# Altium PCB KUOZHAN.PCBDOC (part 20 of 21)
Units mm, origin at the board's own origin, x right, y up, seen from the top; angles counter-clockwise.
Board outline 165.51 x 116.38 mm, 2 copper layers (Top Layer, Bottom Layer); 171 components, 245 nets, 894 pads, 298 vias.
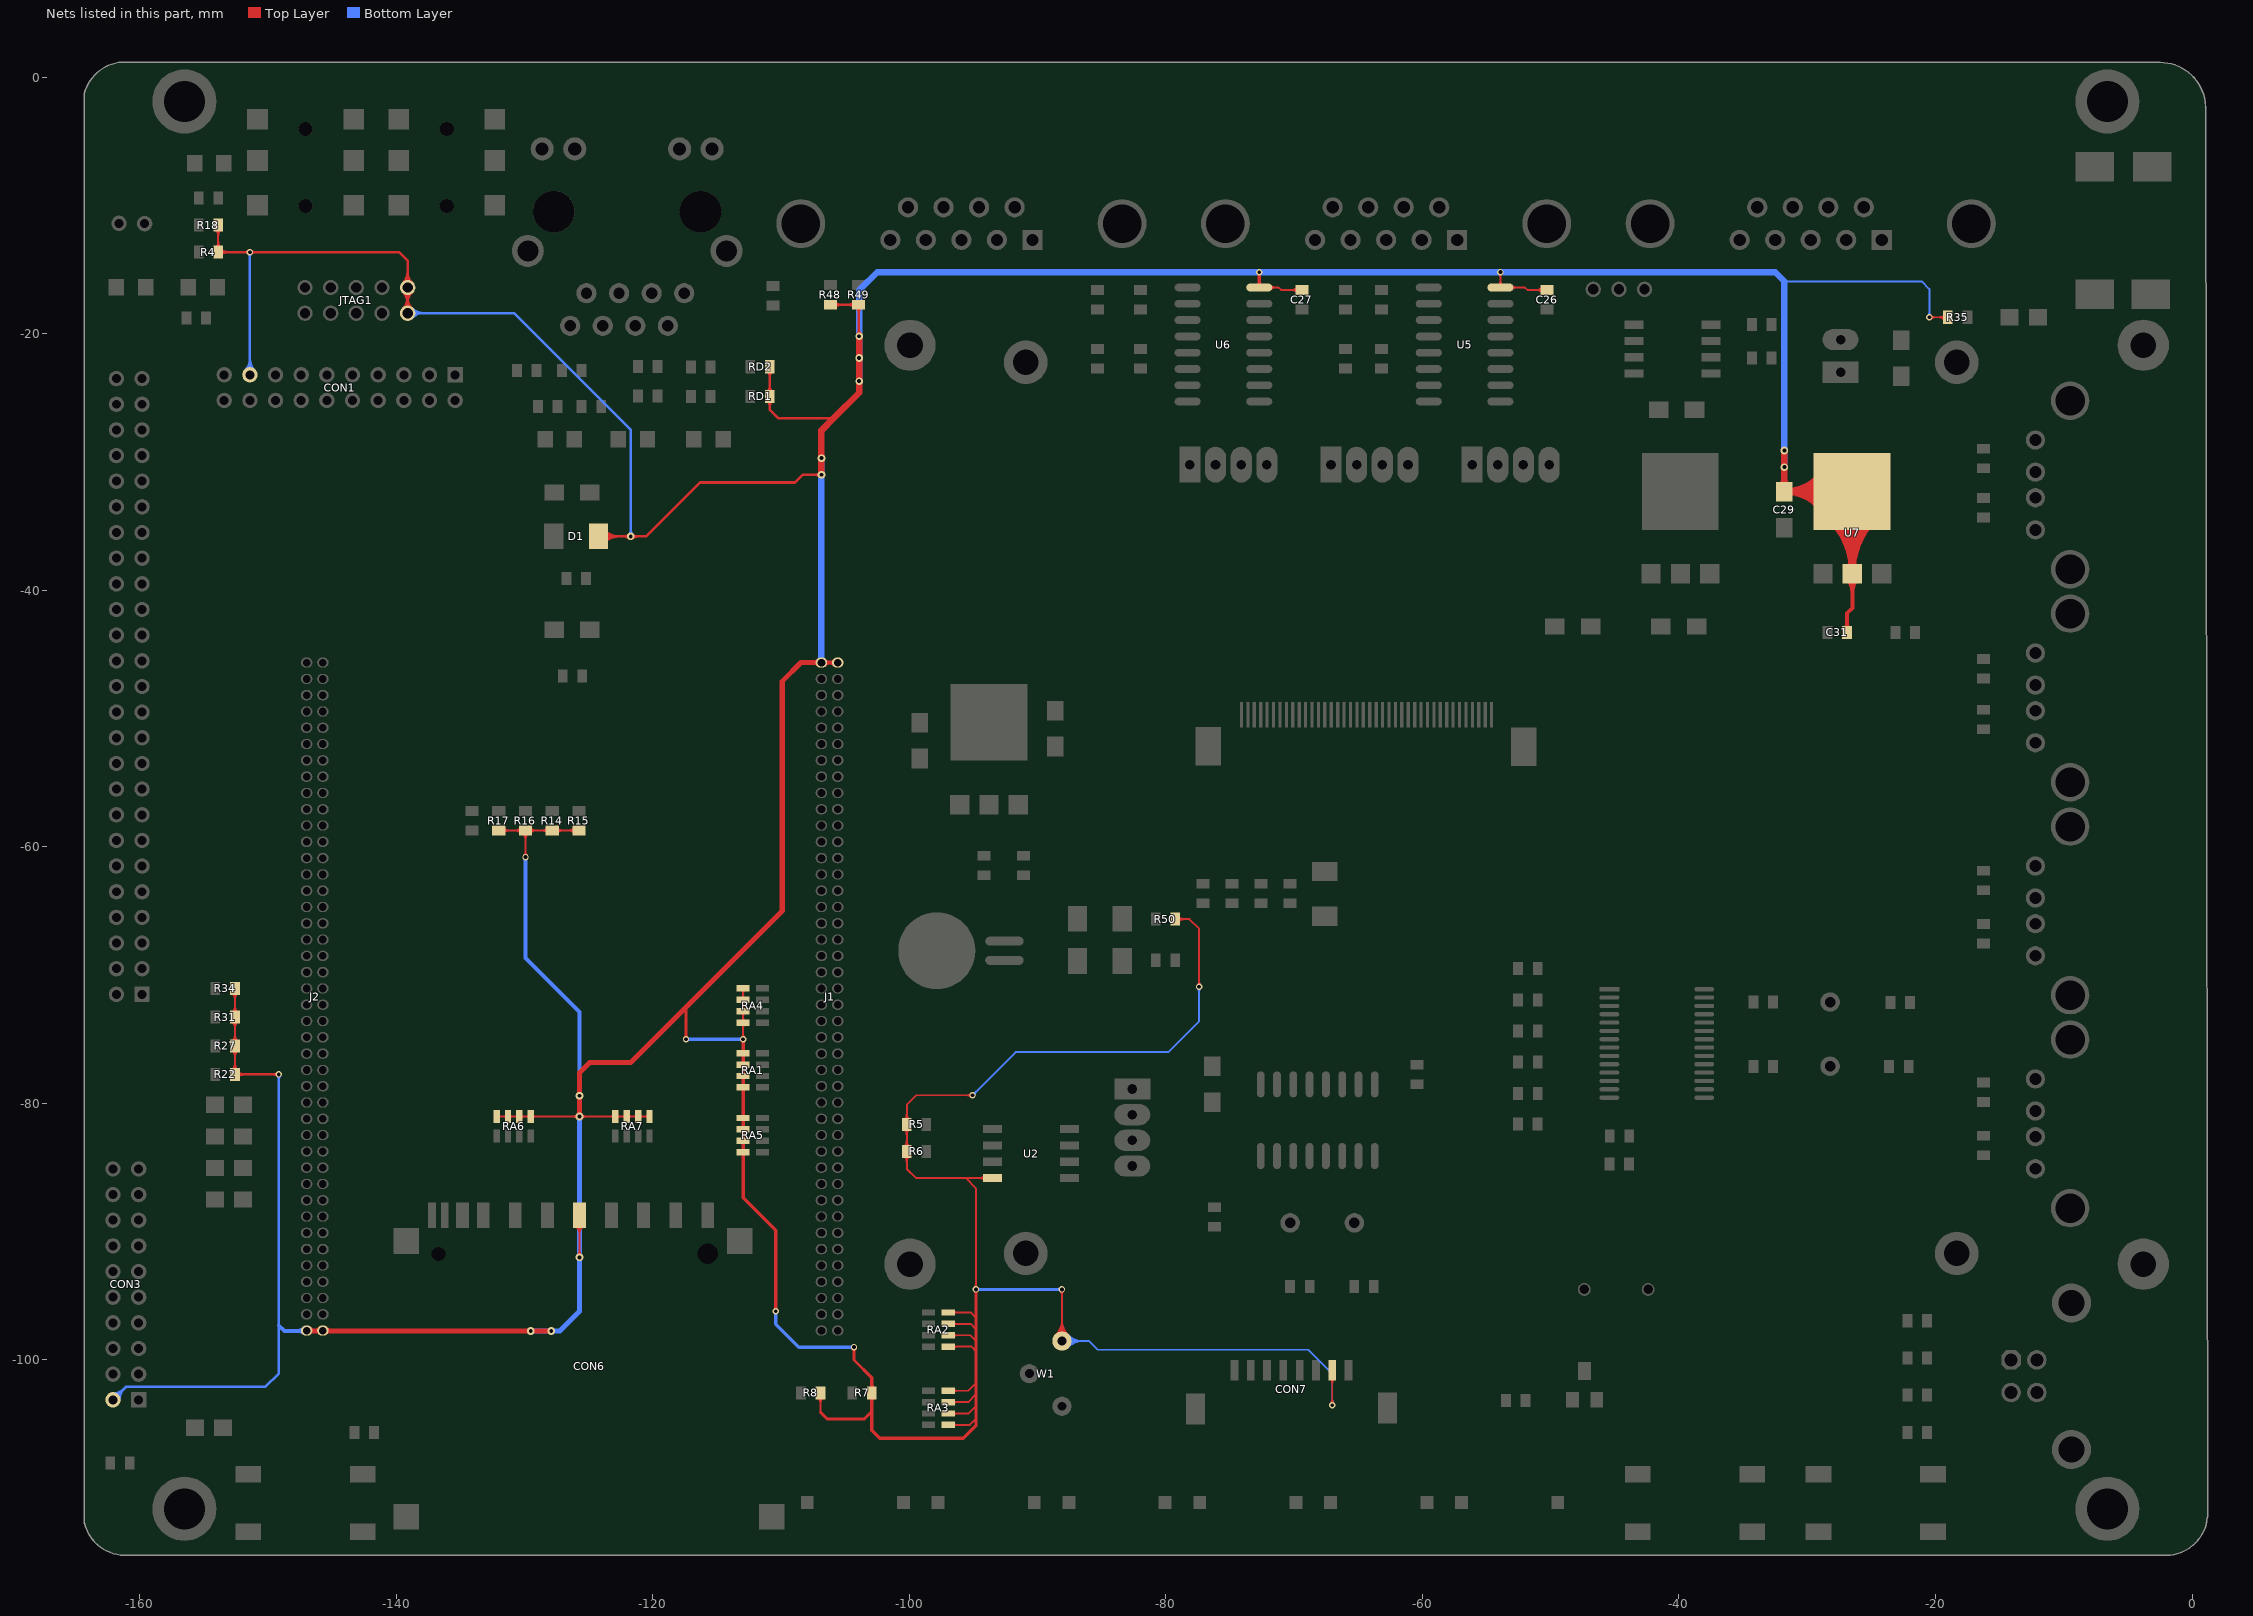
[diagram p20: the nets of this part, all layers, seen from the top]

## Via types
v1: diameter 0.5, hole 0.3, Top Layer to Bottom Layer, 272 vias
v2: diameter 0.6, hole 0.3, Top Layer to Bottom Layer, 24 vias
v3: diameter 0.9, hole 0.9, Top Layer to Bottom Layer, 2 vias

## Nets (pads, with @x,y where several pads share a name; then routed paths per layer and width w, separated by ;. In a path a pad name is that pad's centre, name@x,y a point inside that pad or via, vN(x,y) a via of type N, cw(c..) or ccw(c..) an arc to the next point about the centre after c; other vN are vias at no path point) (continued)
VDD33V: (continued)
  Top Layer w0.2: R4.2@-153.863,-13.64 -152.06,-13.64 -139.76,-13.64 -139.099,-14.301 JTAG1.1@-139.099,-16.403 JTAG1.2@-139.099,-18.403 ; R22.2@-152.563,-77.74 v1(-149.14,-77.74) ; -151.65,-13.64 cw(c-151.65,-13.904) v1@-151.464,-13.718 ; v1@-151.62,-13.64 ccw(c-151.62,-13.421) v1@-151.464,-13.576 ; v1@-151.323,-13.718 cw(c-151.137,-13.904) -151.137,-13.64 ; v1@-151.323,-13.576 ccw(c-151.168,-13.421) v1@-151.168,-13.64 ; v1@-149.211,-77.811 ccw(c-149.382,-77.982) -149.382,-77.74 ccw(c-149.382,-77.499) v1@-149.211,-77.67 ; D1.1@-124.215,-35.801 -120.501,-35.801 -116.3,-31.6 -108.9,-31.6 -108.3,-31 v2(-106.841,-31) ; RD2.2@-110.863,-22.576 RD1.2@-110.863,-24.89 -110.863,-25.937 -110.2,-26.6 -105.9,-26.6 ; R48.2@-106.14,-17.737 R49.2@-103.94,-17.737 v2@-103.94,-20.16 ; R4.2@-153.665,-13.839 cw(c-153.185,-14.319) -153.185,-13.64 ; R4.2@-153.665,-13.839 cw(c-153.185,-14.319) -153.185,-13.64 ; R4.2@-153.665,-13.839 cw(c-153.185,-14.319) -153.185,-13.64 ; R4.2@-153.665,-13.839 cw(c-153.185,-14.319) -153.185,-13.64 ; R4.2@-153.665,-13.839 cw(c-153.185,-14.319) -153.185,-13.64 ; R4.2@-153.665,-13.442 ccw(c-153.185,-12.962) -153.185,-13.64 ; R4.2@-153.665,-13.442 ccw(c-153.185,-12.962) -153.185,-13.64 ; R4.2@-153.665,-13.442 ccw(c-153.185,-12.962) -153.185,-13.64 ; R4.2@-153.665,-13.442 ccw(c-153.185,-12.962) -153.185,-13.64 ; R4.2@-153.665,-13.442 ccw(c-153.185,-12.962) -153.185,-13.64 ; R22.2@-152.365,-77.939 cw(c-151.885,-78.419) -151.885,-77.74 ; R22.2@-152.365,-77.939 cw(c-151.885,-78.419) -151.885,-77.74 ; R22.2@-152.365,-77.939 cw(c-151.885,-78.419) -151.885,-77.74 ; R22.2@-152.365,-77.939 cw(c-151.885,-78.419) -151.885,-77.74 ; R22.2@-152.365,-77.939 cw(c-151.885,-78.419) -151.885,-77.74 ; R22.2@-152.365,-77.542 ccw(c-151.885,-77.062) -151.885,-77.74 ; R22.2@-152.365,-77.542 ccw(c-151.885,-77.062) -151.885,-77.74 ; R22.2@-152.365,-77.542 ccw(c-151.885,-77.062) -151.885,-77.74 ; R22.2@-152.365,-77.542 ccw(c-151.885,-77.062) -151.885,-77.74 ; R22.2@-152.365,-77.542 ccw(c-151.885,-77.062) -151.885,-77.74 ; -151.771,-13.64 cw(c-151.771,-14.024) v1@-151.5,-13.753 ; -151.771,-13.64 cw(c-151.771,-14.024) v1@-151.5,-13.753 ; -151.771,-13.64 cw(c-151.771,-14.024) v1@-151.5,-13.753 ; -151.771,-13.64 cw(c-151.771,-14.024) v1@-151.5,-13.753 ; -151.74,-13.64 ccw(c-151.74,-13.3) v1@-151.5,-13.541 ; -151.74,-13.64 ccw(c-151.74,-13.3) v1@-151.5,-13.541 ; -151.74,-13.64 ccw(c-151.74,-13.3) v1@-151.5,-13.541 ; -151.74,-13.64 ccw(c-151.74,-13.3) v1@-151.5,-13.541 ; v1@-151.288,-13.753 cw(c-151.016,-14.024) -151.016,-13.64 ; v1@-151.288,-13.753 cw(c-151.016,-14.024) -151.016,-13.64 ; v1@-151.288,-13.753 cw(c-151.016,-14.024) -151.016,-13.64 ; v1@-151.288,-13.753 cw(c-151.016,-14.024) -151.016,-13.64 ; v1@-151.288,-13.541 ccw(c-151.047,-13.3) -151.047,-13.64 ; v1@-151.288,-13.541 ccw(c-151.047,-13.3) -151.047,-13.64 ; v1@-151.288,-13.541 ccw(c-151.047,-13.3) -151.047,-13.64 ; v1@-151.288,-13.541 ccw(c-151.047,-13.3) -151.047,-13.64 ; -149.503,-77.74 cw(c-149.503,-78.103) v1@-149.246,-77.846 ; -149.503,-77.74 ccw(c-149.503,-77.378) v1@-149.246,-77.634 ; -149.503,-77.74 cw(c-149.503,-78.103) v1@-149.246,-77.846 ; -149.503,-77.74 ccw(c-149.503,-77.378) v1@-149.246,-77.634 ; -149.503,-77.74 cw(c-149.503,-78.103) v1@-149.246,-77.846 ; -149.503,-77.74 ccw(c-149.503,-77.378) v1@-149.246,-77.634 ; -149.503,-77.74 ccw(c-149.503,-77.378) v1@-149.246,-77.634 ; -149.503,-77.74 cw(c-149.503,-78.103) v1@-149.246,-77.846 ; JTAG1.2@-139.452,-18.049 ccw(c-140.306,-17.195) -139.099,-17.195 ; JTAG1.2@-139.452,-18.049 ccw(c-140.306,-17.195) -139.099,-17.195 ; JTAG1.2@-139.452,-18.049 ccw(c-140.306,-17.195) -139.099,-17.195 ; JTAG1.2@-139.452,-18.049 ccw(c-140.306,-17.195) -139.099,-17.195 ; JTAG1.2@-139.452,-18.049 ccw(c-140.306,-17.195) -139.099,-17.195 ; JTAG1.1@-139.452,-16.756 cw(c-140.306,-17.61) -139.099,-17.61 ; JTAG1.1@-139.452,-16.756 cw(c-140.306,-17.61) -139.099,-17.61 ; JTAG1.1@-139.452,-16.756 cw(c-140.306,-17.61) -139.099,-17.61 ; JTAG1.1@-139.452,-16.756 cw(c-140.306,-17.61) -139.099,-17.61 ; JTAG1.1@-139.452,-16.756 cw(c-140.306,-17.61) -139.099,-17.61 ; JTAG1.1@-139.452,-16.049 ccw(c-140.306,-15.195) -139.099,-15.195 ; JTAG1.1@-139.452,-16.049 ccw(c-140.306,-15.195) -139.099,-15.195 ; JTAG1.1@-139.452,-16.049 ccw(c-140.306,-15.195) -139.099,-15.195 ; JTAG1.1@-139.452,-16.049 ccw(c-140.306,-15.195) -139.099,-15.195 ; JTAG1.1@-139.452,-16.049 ccw(c-140.306,-15.195) -139.099,-15.195 ; JTAG1.2@-139.311,-18.19 ccw(c-139.823,-17.678) -139.099,-17.678 ; JTAG1.2@-139.311,-18.19 ccw(c-139.823,-17.678) -139.099,-17.678 ; JTAG1.2@-139.311,-18.19 ccw(c-139.823,-17.678) -139.099,-17.678 ; JTAG1.2@-139.311,-18.19 ccw(c-139.823,-17.678) -139.099,-17.678 ; JTAG1.2@-139.311,-18.19 ccw(c-139.823,-17.678) -139.099,-17.678 ; JTAG1.1@-139.311,-16.615 cw(c-139.823,-17.127) -139.099,-17.127 ; JTAG1.1@-139.311,-16.615 cw(c-139.823,-17.127) -139.099,-17.127 ; JTAG1.1@-139.311,-16.615 cw(c-139.823,-17.127) -139.099,-17.127 ; JTAG1.1@-139.311,-16.615 cw(c-139.823,-17.127) -139.099,-17.127 ; JTAG1.1@-139.311,-16.615 cw(c-139.823,-17.127) -139.099,-17.127 ; JTAG1.1@-139.311,-16.19 ccw(c-139.823,-15.678) -139.099,-15.678 ; JTAG1.1@-139.311,-16.19 ccw(c-139.823,-15.678) -139.099,-15.678 ; JTAG1.1@-139.311,-16.19 ccw(c-139.823,-15.678) -139.099,-15.678 ; JTAG1.1@-139.311,-16.19 ccw(c-139.823,-15.678) -139.099,-15.678 ; JTAG1.1@-139.311,-16.19 ccw(c-139.823,-15.678) -139.099,-15.678 ; -139.099,-17.678 ccw(c-138.375,-17.678) JTAG1.2@-138.887,-18.19 ; -139.099,-17.678 ccw(c-138.375,-17.678) JTAG1.2@-138.887,-18.19 ; -139.099,-17.678 ccw(c-138.375,-17.678) JTAG1.2@-138.887,-18.19 ; -139.099,-17.678 ccw(c-138.375,-17.678) JTAG1.2@-138.887,-18.19 ; -139.099,-17.678 ccw(c-138.375,-17.678) JTAG1.2@-138.887,-18.19 ; -139.099,-17.61 cw(c-137.892,-17.61) JTAG1.1@-138.745,-16.756 ; -139.099,-17.61 cw(c-137.892,-17.61) JTAG1.1@-138.745,-16.756 ; -139.099,-17.61 cw(c-137.892,-17.61) JTAG1.1@-138.745,-16.756 ; -139.099,-17.61 cw(c-137.892,-17.61) JTAG1.1@-138.745,-16.756 ; -139.099,-17.61 cw(c-137.892,-17.61) JTAG1.1@-138.745,-16.756 ; -139.099,-17.195 ccw(c-137.892,-17.195) JTAG1.2@-138.745,-18.049 ; -139.099,-17.195 ccw(c-137.892,-17.195) JTAG1.2@-138.745,-18.049 ; -139.099,-17.195 ccw(c-137.892,-17.195) JTAG1.2@-138.745,-18.049 ; -139.099,-17.195 ccw(c-137.892,-17.195) JTAG1.2@-138.745,-18.049 ; -139.099,-17.195 ccw(c-137.892,-17.195) JTAG1.2@-138.745,-18.049 ; -139.099,-17.127 cw(c-138.375,-17.127) JTAG1.1@-138.887,-16.615 ; -139.099,-17.127 cw(c-138.375,-17.127) JTAG1.1@-138.887,-16.615 ; -139.099,-17.127 cw(c-138.375,-17.127) JTAG1.1@-138.887,-16.615 ; -139.099,-17.127 cw(c-138.375,-17.127) JTAG1.1@-138.887,-16.615 ; -139.099,-17.127 cw(c-138.375,-17.127) JTAG1.1@-138.887,-16.615 ; -139.099,-15.678 ccw(c-138.375,-15.678) JTAG1.1@-138.887,-16.19 ; -139.099,-15.678 ccw(c-138.375,-15.678) JTAG1.1@-138.887,-16.19 ; -139.099,-15.678 ccw(c-138.375,-15.678) JTAG1.1@-138.887,-16.19 ; -139.099,-15.678 ccw(c-138.375,-15.678) JTAG1.1@-138.887,-16.19 ; -139.099,-15.678 ccw(c-138.375,-15.678) JTAG1.1@-138.887,-16.19 ; -139.099,-15.195 ccw(c-137.892,-15.195) JTAG1.1@-138.745,-16.049 ; -139.099,-15.195 ccw(c-137.892,-15.195) JTAG1.1@-138.745,-16.049 ; -139.099,-15.195 ccw(c-137.892,-15.195) JTAG1.1@-138.745,-16.049 ; -139.099,-15.195 ccw(c-137.892,-15.195) JTAG1.1@-138.745,-16.049 ; -139.099,-15.195 ccw(c-137.892,-15.195) JTAG1.1@-138.745,-16.049 ; D1.1@-123.896,-36.119 cw(c-123.128,-36.887) -123.128,-35.801 ; D1.1@-123.896,-36.119 cw(c-123.128,-36.887) -123.128,-35.801 ; D1.1@-123.896,-36.119 cw(c-123.128,-36.887) -123.128,-35.801 ; D1.1@-123.896,-36.119 cw(c-123.128,-36.887) -123.128,-35.801 ; D1.1@-123.896,-36.119 cw(c-123.128,-36.887) -123.128,-35.801 ; D1.1@-123.896,-35.482 ccw(c-123.128,-34.714) -123.128,-35.801 ; D1.1@-123.896,-35.482 ccw(c-123.128,-34.714) -123.128,-35.801 ; D1.1@-123.896,-35.482 ccw(c-123.128,-34.714) -123.128,-35.801 ; D1.1@-123.896,-35.482 ccw(c-123.128,-34.714) -123.128,-35.801 ; D1.1@-123.896,-35.482 ccw(c-123.128,-34.714) -123.128,-35.801 ; D1.1@-123.755,-36.26 cw(c-122.645,-37.37) -122.645,-35.801 ; D1.1@-123.755,-36.26 cw(c-122.645,-37.37) -122.645,-35.801 ; D1.1@-123.755,-36.26 cw(c-122.645,-37.37) -122.645,-35.801 ; D1.1@-123.755,-36.26 cw(c-122.645,-37.37) -122.645,-35.801 ; D1.1@-123.755,-36.26 cw(c-122.645,-37.37) -122.645,-35.801 ; D1.1@-123.755,-35.341 ccw(c-122.645,-34.231) -122.645,-35.801 ; D1.1@-123.755,-35.341 ccw(c-122.645,-34.231) -122.645,-35.801 ; D1.1@-123.755,-35.341 ccw(c-122.645,-34.231) -122.645,-35.801 ; D1.1@-123.755,-35.341 ccw(c-122.645,-34.231) -122.645,-35.801 ; D1.1@-123.755,-35.341 ccw(c-122.645,-34.231) -122.645,-35.801 ; -122.183,-35.801 cw(c-122.183,-36.283) v2@-121.841,-35.942 ; -122.183,-35.801 ccw(c-122.183,-35.318) v2@-121.841,-35.659 ; -122.183,-35.801 cw(c-122.183,-36.283) v2@-121.841,-35.942 ; -122.183,-35.801 ccw(c-122.183,-35.318) v2@-121.841,-35.659 ; -122.183,-35.801 cw(c-122.183,-36.283) v2@-121.841,-35.942 ; -122.183,-35.801 ccw(c-122.183,-35.318) v2@-121.841,-35.659 ; -122.183,-35.801 cw(c-122.183,-36.283) v2@-121.841,-35.942 ; -122.183,-35.801 ccw(c-122.183,-35.318) v2@-121.841,-35.659 ; -122.183,-35.801 ccw(c-122.183,-35.318) v2@-121.841,-35.659 ; -122.183,-35.801 cw(c-122.183,-36.283) v2@-121.841,-35.942 ; v2@-121.559,-35.942 cw(c-121.217,-36.283) -121.217,-35.801 ; v2@-121.559,-35.942 cw(c-121.217,-36.283) -121.217,-35.801 ; v2@-121.559,-35.942 cw(c-121.217,-36.283) -121.217,-35.801 ; v2@-121.559,-35.942 cw(c-121.217,-36.283) -121.217,-35.801 ; v2@-121.559,-35.942 cw(c-121.217,-36.283) -121.217,-35.801 ; v2@-121.559,-35.659 ccw(c-121.217,-35.318) -121.217,-35.801 ; v2@-121.559,-35.659 ccw(c-121.217,-35.318) -121.217,-35.801 ; v2@-121.559,-35.659 ccw(c-121.217,-35.318) -121.217,-35.801 ; v2@-121.559,-35.659 ccw(c-121.217,-35.318) -121.217,-35.801 ; v2@-121.559,-35.659 ccw(c-121.217,-35.318) -121.217,-35.801 ; RD1.2@-111.062,-25.215 cw(c-111.542,-25.695) -110.863,-25.695 ; RD1.2@-111.062,-25.215 cw(c-111.542,-25.695) -110.863,-25.695 ; RD1.2@-111.062,-25.215 cw(c-111.542,-25.695) -110.863,-25.695 ; RD1.2@-111.062,-25.215 cw(c-111.542,-25.695) -110.863,-25.695 ; RD1.2@-111.062,-25.215 cw(c-111.542,-25.695) -110.863,-25.695 ; RD1.2@-111.062,-24.564 ccw(c-111.542,-24.084) -110.863,-24.084 ; RD1.2@-111.062,-24.564 ccw(c-111.542,-24.084) -110.863,-24.084 ; RD1.2@-111.062,-24.564 ccw(c-111.542,-24.084) -110.863,-24.084 ; RD1.2@-111.062,-24.564 ccw(c-111.542,-24.084) -110.863,-24.084 ; RD1.2@-111.062,-24.564 ccw(c-111.542,-24.084) -110.863,-24.084 ; RD2.2@-111.062,-22.902 cw(c-111.542,-23.382) -110.863,-23.382 ; RD2.2@-111.062,-22.902 cw(c-111.542,-23.382) -110.863,-23.382 ; RD2.2@-111.062,-22.902 cw(c-111.542,-23.382) -110.863,-23.382 ; RD2.2@-111.062,-22.902 cw(c-111.542,-23.382) -110.863,-23.382 ; RD2.2@-111.062,-22.902 cw(c-111.542,-23.382) -110.863,-23.382 ; -110.863,-25.695 cw(c-110.185,-25.695) RD1.2@-110.665,-25.215 ; -110.863,-25.695 cw(c-110.185,-25.695) RD1.2@-110.665,-25.215 ; -110.863,-25.695 cw(c-110.185,-25.695) RD1.2@-110.665,-25.215 ; -110.863,-25.695 cw(c-110.185,-25.695) RD1.2@-110.665,-25.215 ; -110.863,-25.695 cw(c-110.185,-25.695) RD1.2@-110.665,-25.215 ; -110.863,-24.084 ccw(c-110.185,-24.084) RD1.2@-110.665,-24.564 ; -110.863,-24.084 ccw(c-110.185,-24.084) RD1.2@-110.665,-24.564 ; -110.863,-24.084 ccw(c-110.185,-24.084) RD1.2@-110.665,-24.564 ; -110.863,-24.084 ccw(c-110.185,-24.084) RD1.2@-110.665,-24.564 ; -110.863,-24.084 ccw(c-110.185,-24.084) RD1.2@-110.665,-24.564 ; -110.863,-23.382 cw(c-110.185,-23.382) RD2.2@-110.665,-22.902 ; -110.863,-23.382 cw(c-110.185,-23.382) RD2.2@-110.665,-22.902 ; -110.863,-23.382 cw(c-110.185,-23.382) RD2.2@-110.665,-22.902 ; -110.863,-23.382 cw(c-110.185,-23.382) RD2.2@-110.665,-22.902 ; -110.863,-23.382 cw(c-110.185,-23.382) RD2.2@-110.665,-22.902 ; -107.324,-31 cw(c-107.324,-31.483) v2@-106.982,-31.141 ; -107.324,-31 ccw(c-107.324,-30.517) v2@-106.982,-30.859 ; -107.324,-31 cw(c-107.324,-31.483) v2@-106.982,-31.141 ; -107.324,-31 ccw(c-107.324,-30.517) v2@-106.982,-30.859 ; -107.324,-31 cw(c-107.324,-31.483) v2@-106.982,-31.141 ; -107.324,-31 ccw(c-107.324,-30.517) v2@-106.982,-30.859 ; -107.324,-31 cw(c-107.324,-31.483) v2@-106.982,-31.141 ; -107.324,-31 ccw(c-107.324,-30.517) v2@-106.982,-30.859 ; -107.324,-31 ccw(c-107.324,-30.517) v2@-106.982,-30.859 ; -107.324,-31 cw(c-107.324,-31.483) v2@-106.982,-31.141 ; R48.2@-105.815,-17.935 cw(c-105.335,-18.415) -105.335,-17.737 ; R48.2@-105.815,-17.935 cw(c-105.335,-18.415) -105.335,-17.737 ; R48.2@-105.815,-17.935 cw(c-105.335,-18.415) -105.335,-17.737 ; R48.2@-105.815,-17.935 cw(c-105.335,-18.415) -105.335,-17.737 ; R48.2@-105.815,-17.935 cw(c-105.335,-18.415) -105.335,-17.737 ; R48.2@-105.815,-17.538 ccw(c-105.335,-17.058) -105.335,-17.737 ; R48.2@-105.815,-17.538 ccw(c-105.335,-17.058) -105.335,-17.737 ; R48.2@-105.815,-17.538 ccw(c-105.335,-17.058) -105.335,-17.737 ; R48.2@-105.815,-17.538 ccw(c-105.335,-17.058) -105.335,-17.737 ; R48.2@-105.815,-17.538 ccw(c-105.335,-17.058) -105.335,-17.737 ; -104.746,-17.737 cw(c-104.746,-18.415) R49.2@-104.266,-17.935 ; -104.746,-17.737 ccw(c-104.746,-17.058) R49.2@-104.266,-17.538 ; -104.746,-17.737 cw(c-104.746,-18.415) R49.2@-104.266,-17.935 ; -104.746,-17.737 ccw(c-104.746,-17.058) R49.2@-104.266,-17.538 ; -104.746,-17.737 cw(c-104.746,-18.415) R49.2@-104.266,-17.935 ; -104.746,-17.737 ccw(c-104.746,-17.058) R49.2@-104.266,-17.538 ; -104.746,-17.737 cw(c-104.746,-18.415) R49.2@-104.266,-17.935 ; -104.746,-17.737 ccw(c-104.746,-17.058) R49.2@-104.266,-17.538 ; -104.746,-17.737 ccw(c-104.746,-17.058) R49.2@-104.266,-17.538 ; -104.746,-17.737 cw(c-104.746,-18.415) R49.2@-104.266,-17.935 ; R49.2@-104.139,-17.935 cw(c-104.619,-18.415) -103.94,-18.415 ; R49.2@-104.139,-17.935 cw(c-104.619,-18.415) -103.94,-18.415 ; R49.2@-104.139,-17.935 cw(c-104.619,-18.415) -103.94,-18.415 ; R49.2@-104.139,-17.935 cw(c-104.619,-18.415) -103.94,-18.415 ; R49.2@-104.139,-17.935 cw(c-104.619,-18.415) -103.94,-18.415 ; v2@-104.041,-20.059 ccw(c-104.285,-19.815) -103.94,-19.815 ; v2@-104.041,-20.059 ccw(c-104.285,-19.815) -103.94,-19.815 ; v2@-104.041,-20.059 ccw(c-104.285,-19.815) -103.94,-19.815 ; v2@-104.041,-20.059 ccw(c-104.285,-19.815) -103.94,-19.815 ; v2@-104.041,-20.059 ccw(c-104.285,-19.815) -103.94,-19.815 ; -103.94,-19.62 ccw(c-103.32,-19.62) v2@-103.759,-20.059 ; -103.94,-19.62 ccw(c-103.32,-19.62) v2@-103.759,-20.059 ; -103.94,-19.62 ccw(c-103.32,-19.62) v2@-103.759,-20.059 ; -103.94,-19.62 ccw(c-103.32,-19.62) v2@-103.759,-20.059 ; -103.94,-19.62 ccw(c-103.32,-19.62) v2@-103.759,-20.059 ; -103.94,-18.415 cw(c-103.262,-18.415) R49.2@-103.742,-17.935 ; -103.94,-18.415 cw(c-103.262,-18.415) R49.2@-103.742,-17.935 ; -103.94,-18.415 cw(c-103.262,-18.415) R49.2@-103.742,-17.935 ; -103.94,-18.415 cw(c-103.262,-18.415) R49.2@-103.742,-17.935 ; -103.94,-18.415 cw(c-103.262,-18.415) R49.2@-103.742,-17.935
  Top Layer w0.25: v1(-117.4,-75) -117.4,-72.5 ; v1(-112.944,-75) RA1.5@-112.944,-76.087 RA1.6@-112.944,-76.976 RA1.7@-112.944,-77.865 RA1.8@-112.944,-78.754 RA5.5@-112.944,-81.137 RA5.6@-112.944,-82.026 RA5.7@-112.944,-82.915 RA5.8@-112.944,-83.804 -112.944,-87.356 -110.4,-89.9 v1(-110.4,-96.2) ; -106.913,-104.087 -106.4,-104.6 -103.5,-104.6 -102.913,-104.013 ; v1(-104.3,-99) -104.3,-100 -102.913,-101.387 R7.1@-102.913,-102.56 -102.913,-104.013 ; -94.8,-104.8 -94.8,-102.685 -94.8,-101.8 -94.8,-99.3 -94.8,-98.5 -94.8,-97.6 -94.8,-96.7 v1(-94.8,-94.5) ; -94.8,-104.6 -94.8,-105.125 -95.775,-106.1 -102.3,-106.1 -102.913,-105.487 -102.913,-104.013 ; v1@-117.488,-74.912 ccw(c-117.702,-74.698) -117.4,-74.698 ; v1@-117.488,-74.912 ccw(c-117.702,-74.698) -117.4,-74.698 ; v1@-117.488,-74.912 ccw(c-117.702,-74.698) -117.4,-74.698 ; -117.4,-74.698 ccw(c-117.098,-74.698) v1@-117.312,-74.912 ; -117.4,-74.698 ccw(c-117.098,-74.698) v1@-117.312,-74.912 ; -117.4,-74.698 ccw(c-117.098,-74.698) v1@-117.312,-74.912 ; RA5.8@-113.032,-83.892 cw(c-113.245,-84.106) -112.944,-84.106 ; RA5.8@-113.032,-83.892 cw(c-113.245,-84.106) -112.944,-84.106 ; RA5.8@-113.032,-83.892 cw(c-113.245,-84.106) -112.944,-84.106 ; RA5.8@-113.032,-83.716 ccw(c-113.245,-83.502) -112.944,-83.502 ; RA5.8@-113.032,-83.716 ccw(c-113.245,-83.502) -112.944,-83.502 ; RA5.8@-113.032,-83.716 ccw(c-113.245,-83.502) -112.944,-83.502 ; RA5.7@-113.032,-83.003 cw(c-113.245,-83.217) -112.944,-83.217 ; RA5.7@-113.032,-83.003 cw(c-113.245,-83.217) -112.944,-83.217 ; RA5.7@-113.032,-83.003 cw(c-113.245,-83.217) -112.944,-83.217 ; RA5.7@-113.032,-82.827 ccw(c-113.245,-82.613) -112.944,-82.613 ; RA5.7@-113.032,-82.827 ccw(c-113.245,-82.613) -112.944,-82.613 ; RA5.7@-113.032,-82.827 ccw(c-113.245,-82.613) -112.944,-82.613 ; RA5.6@-113.032,-82.114 cw(c-113.245,-82.328) -112.944,-82.328 ; RA5.6@-113.032,-82.114 cw(c-113.245,-82.328) -112.944,-82.328 ; RA5.6@-113.032,-82.114 cw(c-113.245,-82.328) -112.944,-82.328 ; RA5.6@-113.032,-81.938 ccw(c-113.245,-81.724) -112.944,-81.724 ; RA5.6@-113.032,-81.938 ccw(c-113.245,-81.724) -112.944,-81.724 ; RA5.6@-113.032,-81.938 ccw(c-113.245,-81.724) -112.944,-81.724 ; RA5.5@-113.032,-81.225 cw(c-113.245,-81.439) -112.944,-81.439 ; RA5.5@-113.032,-81.225 cw(c-113.245,-81.439) -112.944,-81.439 ; RA5.5@-113.032,-81.225 cw(c-113.245,-81.439) -112.944,-81.439 ; RA5.5@-113.032,-81.049 ccw(c-113.245,-80.835) -112.944,-80.835 ; RA5.5@-113.032,-81.049 ccw(c-113.245,-80.835) -112.944,-80.835 ; RA5.5@-113.032,-81.049 ccw(c-113.245,-80.835) -112.944,-80.835 ; RA1.8@-113.032,-78.842 cw(c-113.245,-79.056) -112.944,-79.056 ; RA1.8@-113.032,-78.842 cw(c-113.245,-79.056) -112.944,-79.056 ; RA1.8@-113.032,-78.842 cw(c-113.245,-79.056) -112.944,-79.056 ; RA1.8@-113.032,-78.666 ccw(c-113.245,-78.452) -112.944,-78.452 ; RA1.8@-113.032,-78.666 ccw(c-113.245,-78.452) -112.944,-78.452 ; RA1.8@-113.032,-78.666 ccw(c-113.245,-78.452) -112.944,-78.452 ; RA1.7@-113.032,-77.953 cw(c-113.245,-78.167) -112.944,-78.167 ; RA1.7@-113.032,-77.953 cw(c-113.245,-78.167) -112.944,-78.167 ; RA1.7@-113.032,-77.953 cw(c-113.245,-78.167) -112.944,-78.167 ; RA1.7@-113.032,-77.777 ccw(c-113.245,-77.563) -112.944,-77.563 ; RA1.7@-113.032,-77.777 ccw(c-113.245,-77.563) -112.944,-77.563 ; RA1.7@-113.032,-77.777 ccw(c-113.245,-77.563) -112.944,-77.563 ; RA1.6@-113.032,-77.064 cw(c-113.245,-77.278) -112.944,-77.278 ; RA1.6@-113.032,-77.064 cw(c-113.245,-77.278) -112.944,-77.278 ; RA1.6@-113.032,-77.064 cw(c-113.245,-77.278) -112.944,-77.278 ; RA1.6@-113.032,-76.888 ccw(c-113.245,-76.674) -112.944,-76.674 ; RA1.6@-113.032,-76.888 ccw(c-113.245,-76.674) -112.944,-76.674 ; RA1.6@-113.032,-76.888 ccw(c-113.245,-76.674) -112.944,-76.674 ; RA1.5@-113.032,-76.175 cw(c-113.245,-76.389) -112.944,-76.389 ; RA1.5@-113.032,-76.175 cw(c-113.245,-76.389) -112.944,-76.389 ; RA1.5@-113.032,-76.175 cw(c-113.245,-76.389) -112.944,-76.389 ; RA1.5@-113.032,-75.999 ccw(c-113.245,-75.785) -112.944,-75.785 ; RA1.5@-113.032,-75.999 ccw(c-113.245,-75.785) -112.944,-75.785 ; RA1.5@-113.032,-75.999 ccw(c-113.245,-75.785) -112.944,-75.785 ; v1@-113.032,-75.088 cw(c-113.245,-75.302) -112.944,-75.302 ; v1@-113.032,-75.088 cw(c-113.245,-75.302) -112.944,-75.302 ; v1@-113.032,-75.088 cw(c-113.245,-75.302) -112.944,-75.302 ; -112.944,-84.106 cw(c-112.642,-84.106) RA5.8@-112.855,-83.892 ; -112.944,-84.106 cw(c-112.642,-84.106) RA5.8@-112.855,-83.892 ; -112.944,-84.106 cw(c-112.642,-84.106) RA5.8@-112.855,-83.892 ; -112.944,-83.502 ccw(c-112.642,-83.502) RA5.8@-112.855,-83.716 ; -112.944,-83.502 ccw(c-112.642,-83.502) RA5.8@-112.855,-83.716 ; -112.944,-83.502 ccw(c-112.642,-83.502) RA5.8@-112.855,-83.716 ; -112.944,-83.217 cw(c-112.642,-83.217) RA5.7@-112.855,-83.003 ; -112.944,-83.217 cw(c-112.642,-83.217) RA5.7@-112.855,-83.003 ; -112.944,-83.217 cw(c-112.642,-83.217) RA5.7@-112.855,-83.003 ; -112.944,-82.613 ccw(c-112.642,-82.613) RA5.7@-112.855,-82.827 ; -112.944,-82.613 ccw(c-112.642,-82.613) RA5.7@-112.855,-82.827 ; -112.944,-82.613 ccw(c-112.642,-82.613) RA5.7@-112.855,-82.827 ; -112.944,-82.328 cw(c-112.642,-82.328) RA5.6@-112.855,-82.114 ; -112.944,-82.328 cw(c-112.642,-82.328) RA5.6@-112.855,-82.114 ; -112.944,-82.328 cw(c-112.642,-82.328) RA5.6@-112.855,-82.114 ; -112.944,-81.724 ccw(c-112.642,-81.724) RA5.6@-112.855,-81.938 ; -112.944,-81.724 ccw(c-112.642,-81.724) RA5.6@-112.855,-81.938 ; -112.944,-81.724 ccw(c-112.642,-81.724) RA5.6@-112.855,-81.938 ; -112.944,-81.439 cw(c-112.642,-81.439) RA5.5@-112.855,-81.225 ; -112.944,-81.439 cw(c-112.642,-81.439) RA5.5@-112.855,-81.225 ; -112.944,-81.439 cw(c-112.642,-81.439) RA5.5@-112.855,-81.225 ; -112.944,-80.835 ccw(c-112.642,-80.835) RA5.5@-112.855,-81.049 ; -112.944,-80.835 ccw(c-112.642,-80.835) RA5.5@-112.855,-81.049 ; -112.944,-80.835 ccw(c-112.642,-80.835) RA5.5@-112.855,-81.049 ; -112.944,-79.056 cw(c-112.642,-79.056) RA1.8@-112.855,-78.842 ; -112.944,-79.056 cw(c-112.642,-79.056) RA1.8@-112.855,-78.842 ; -112.944,-79.056 cw(c-112.642,-79.056) RA1.8@-112.855,-78.842 ; -112.944,-78.452 ccw(c-112.642,-78.452) RA1.8@-112.855,-78.666 ; -112.944,-78.452 ccw(c-112.642,-78.452) RA1.8@-112.855,-78.666 ; -112.944,-78.452 ccw(c-112.642,-78.452) RA1.8@-112.855,-78.666 ; -112.944,-78.167 cw(c-112.642,-78.167) RA1.7@-112.855,-77.953 ; -112.944,-78.167 cw(c-112.642,-78.167) RA1.7@-112.855,-77.953 ; -112.944,-78.167 cw(c-112.642,-78.167) RA1.7@-112.855,-77.953 ; -112.944,-77.563 ccw(c-112.642,-77.563) RA1.7@-112.855,-77.777 ; -112.944,-77.563 ccw(c-112.642,-77.563) RA1.7@-112.855,-77.777 ; -112.944,-77.563 ccw(c-112.642,-77.563) RA1.7@-112.855,-77.777 ; -112.944,-77.278 cw(c-112.642,-77.278) RA1.6@-112.855,-77.064 ; -112.944,-77.278 cw(c-112.642,-77.278) RA1.6@-112.855,-77.064 ; -112.944,-77.278 cw(c-112.642,-77.278) RA1.6@-112.855,-77.064 ; -112.944,-76.674 ccw(c-112.642,-76.674) RA1.6@-112.855,-76.888 ; -112.944,-76.674 ccw(c-112.642,-76.674) RA1.6@-112.855,-76.888 ; -112.944,-76.674 ccw(c-112.642,-76.674) RA1.6@-112.855,-76.888 ; -112.944,-76.389 cw(c-112.642,-76.389) RA1.5@-112.855,-76.175 ; -112.944,-76.389 cw(c-112.642,-76.389) RA1.5@-112.855,-76.175 ; -112.944,-76.389 cw(c-112.642,-76.389) RA1.5@-112.855,-76.175 ; -112.944,-75.785 ccw(c-112.642,-75.785) RA1.5@-112.855,-75.999 ; -112.944,-75.785 ccw(c-112.642,-75.785) RA1.5@-112.855,-75.999 ; -112.944,-75.785 ccw(c-112.642,-75.785) RA1.5@-112.855,-75.999 ; -112.944,-75.302 cw(c-112.642,-75.302) v1@-112.855,-75.088 ; -112.944,-75.302 cw(c-112.642,-75.302) v1@-112.855,-75.088 ; -112.944,-75.302 cw(c-112.642,-75.302) v1@-112.855,-75.088 ; v1@-110.488,-96.112 ccw(c-110.702,-95.898) -110.4,-95.898 ; v1@-110.488,-96.112 ccw(c-110.702,-95.898) -110.4,-95.898 ; v1@-110.488,-96.112 ccw(c-110.702,-95.898) -110.4,-95.898 ; -110.4,-95.898 ccw(c-110.098,-95.898) v1@-110.312,-96.112 ; -110.4,-95.898 ccw(c-110.098,-95.898) v1@-110.312,-96.112 ; -110.4,-95.898 ccw(c-110.098,-95.898) v1@-110.312,-96.112 ; v1@-104.388,-99.088 cw(c-104.602,-99.302) -104.3,-99.302 ; v1@-104.388,-99.088 cw(c-104.602,-99.302) -104.3,-99.302 ; v1@-104.388,-99.088 cw(c-104.602,-99.302) -104.3,-99.302 ; -104.3,-99.302 cw(c-103.998,-99.302) v1@-104.212,-99.088 ; -104.3,-99.302 cw(c-103.998,-99.302) v1@-104.212,-99.088 ; -104.3,-99.302 cw(c-103.998,-99.302) v1@-104.212,-99.088 ; R7.1@-103.094,-102.868 cw(c-103.531,-103.305) -102.913,-103.305 ; R7.1@-103.094,-102.868 cw(c-103.531,-103.305) -102.913,-103.305 ; R7.1@-103.094,-102.868 cw(c-103.531,-103.305) -102.913,-103.305 ; R7.1@-103.094,-102.252 ccw(c-103.531,-101.815) -102.913,-101.815 ; R7.1@-103.094,-102.252 ccw(c-103.531,-101.815) -102.913,-101.815 ; R7.1@-103.094,-102.252 ccw(c-103.531,-101.815) -102.913,-101.815 ; -102.913,-103.305 cw(c-102.295,-103.305) R7.1@-102.732,-102.868 ; -102.913,-103.305 cw(c-102.295,-103.305) R7.1@-102.732,-102.868 ; -102.913,-103.305 cw(c-102.295,-103.305) R7.1@-102.732,-102.868 ; -102.913,-101.815 ccw(c-102.295,-101.815) R7.1@-102.732,-102.252 ; -102.913,-101.815 ccw(c-102.295,-101.815) R7.1@-102.732,-102.252 ; -102.913,-101.815 ccw(c-102.295,-101.815) R7.1@-102.732,-102.252 ; v1@-94.888,-94.588 cw(c-95.102,-94.802) -94.8,-94.802 ; v1@-94.888,-94.588 cw(c-95.102,-94.802) -94.8,-94.802 ; v1@-94.888,-94.588 cw(c-95.102,-94.802) -94.8,-94.802 ; -94.8,-94.802 cw(c-94.498,-94.802) v1@-94.712,-94.588 ; -94.8,-94.802 cw(c-94.498,-94.802) v1@-94.712,-94.588 ; -94.8,-94.802 cw(c-94.498,-94.802) v1@-94.712,-94.588
  Top Layer w0.254: J2.83@-146.78,-97.937 cw(c-146.314,-98.404) -146.314,-97.744 ; J2.83@-146.78,-97.937 cw(c-146.314,-98.404) -146.314,-97.744 ; J2.83@-146.78,-97.937 cw(c-146.314,-98.404) -146.314,-97.744 ; J2.83@-146.78,-97.551 ccw(c-146.314,-97.085) -146.314,-97.744 ; J2.83@-146.78,-97.551 ccw(c-146.314,-97.085) -146.314,-97.744 ; J2.83@-146.78,-97.551 ccw(c-146.314,-97.085) -146.314,-97.744 ; -146.362,-97.744 cw(c-146.362,-98.404) J2.84@-145.896,-97.937 ; -146.362,-97.744 ccw(c-146.362,-97.085) J2.84@-145.896,-97.551 ; -146.362,-97.744 cw(c-146.362,-98.404) J2.84@-145.896,-97.937 ; -146.362,-97.744 ccw(c-146.362,-97.085) J2.84@-145.896,-97.551 ; -146.362,-97.744 cw(c-146.362,-98.404) J2.84@-145.896,-97.937 ; -146.362,-97.744 ccw(c-146.362,-97.085) J2.84@-145.896,-97.551
  Top Layer w0.3: v2(-125.703,-81.023) v2@-125.703,-81.02 ; J1.1@-106.841,-45.638 J1.2@-105.571,-45.638 ; U6.16@-72.712,-16.4 v1(-72.712,-15.212) ; C31.1@-26.89,-43.279 -26.89,-41.79 -26.483,-41.383 U7.3@-26.483,-38.712 ; J2.84@-145.526,-97.921 cw(c-145.099,-98.348) -145.099,-97.744 ; J2.84@-145.526,-97.921 cw(c-145.099,-98.348) -145.099,-97.744 ; J2.84@-145.526,-97.921 cw(c-145.099,-98.348) -145.099,-97.744 ; J2.84@-145.526,-97.568 ccw(c-145.099,-97.141) -145.099,-97.744 ; J2.84@-145.526,-97.568 ccw(c-145.099,-97.141) -145.099,-97.744 ; J2.84@-145.526,-97.568 ccw(c-145.099,-97.141) -145.099,-97.744 ; -129.862,-97.744 cw(c-129.862,-98.107) v2@-129.606,-97.85 ; -129.862,-97.744 ccw(c-129.862,-97.382) v2@-129.606,-97.638 ; -129.862,-97.744 cw(c-129.862,-98.107) v2@-129.606,-97.85 ; -129.862,-97.744 ccw(c-129.862,-97.382) v2@-129.606,-97.638 ; -129.862,-97.744 cw(c-129.862,-98.107) v2@-129.606,-97.85 ; -129.862,-97.744 ccw(c-129.862,-97.382) v2@-129.606,-97.638 ; v2@-129.394,-97.85 cw(c-129.138,-98.107) -129.138,-97.744 ; v2@-129.394,-97.85 cw(c-129.138,-98.107) -129.138,-97.744 ; v2@-129.394,-97.85 cw(c-129.138,-98.107) -129.138,-97.744 ; v2@-129.394,-97.638 ccw(c-129.138,-97.382) -129.138,-97.744 ; v2@-129.394,-97.638 ccw(c-129.138,-97.382) -129.138,-97.744 ; v2@-129.394,-97.638 ccw(c-129.138,-97.382) -129.138,-97.744 ; -128.262,-97.744 cw(c-128.262,-98.107) v2@-128.006,-97.85 ; -128.262,-97.744 ccw(c-128.262,-97.382) v2@-128.006,-97.638 ; -128.262,-97.744 cw(c-128.262,-98.107) v2@-128.006,-97.85 ; -128.262,-97.744 ccw(c-128.262,-97.382) v2@-128.006,-97.638 ; -128.262,-97.744 cw(c-128.262,-98.107) v2@-128.006,-97.85 ; -128.262,-97.744 ccw(c-128.262,-97.382) v2@-128.006,-97.638 ; v2@-125.809,-80.917 ccw(c-126.065,-80.66) -125.703,-80.66 ; v2@-125.809,-80.917 ccw(c-126.065,-80.66) -125.703,-80.66 ; v2@-125.809,-80.917 ccw(c-126.065,-80.66) -125.703,-80.66 ; v2@-125.809,-79.506 cw(c-126.065,-79.762) -125.703,-79.762 ; v2@-125.809,-79.506 cw(c-126.065,-79.762) -125.703,-79.762 ; v2@-125.809,-79.506 cw(c-126.065,-79.762) -125.703,-79.762 ; v2@-125.809,-79.294 ccw(c-126.065,-79.038) -125.703,-79.038 ; v2@-125.809,-79.294 ccw(c-126.065,-79.038) -125.703,-79.038 ; v2@-125.809,-79.294 ccw(c-126.065,-79.038) -125.703,-79.038 ; -125.703,-80.66 ccw(c-125.341,-80.66) v2@-125.597,-80.917 ; -125.703,-80.66 ccw(c-125.341,-80.66) v2@-125.597,-80.917 ; -125.703,-80.66 ccw(c-125.341,-80.66) v2@-125.597,-80.917 ; -125.703,-79.762 cw(c-125.341,-79.762) v2@-125.597,-79.506 ; -125.703,-79.762 cw(c-125.341,-79.762) v2@-125.597,-79.506 ; -125.703,-79.762 cw(c-125.341,-79.762) v2@-125.597,-79.506 ; -125.703,-79.038 ccw(c-125.341,-79.038) v2@-125.597,-79.294 ; -125.703,-79.038 ccw(c-125.341,-79.038) v2@-125.597,-79.294 ; -125.703,-79.038 ccw(c-125.341,-79.038) v2@-125.597,-79.294 ; -107.444,-45.638 cw(c-107.444,-46.242) J1.1@-107.018,-45.815 ; -107.444,-45.638 ccw(c-107.444,-45.035) J1.1@-107.018,-45.462 ; -107.444,-45.638 cw(c-107.444,-46.242) J1.1@-107.018,-45.815 ; -107.444,-45.638 ccw(c-107.444,-45.035) J1.1@-107.018,-45.462 ; -107.444,-45.638 cw(c-107.444,-46.242) J1.1@-107.018,-45.815 ; -107.444,-45.638 ccw(c-107.444,-45.035) J1.1@-107.018,-45.462 ; J1.1@-106.664,-45.815 cw(c-106.237,-46.242) -106.237,-45.638 ; J1.1@-106.664,-45.815 cw(c-106.237,-46.242) -106.237,-45.638 ; J1.1@-106.664,-45.815 cw(c-106.237,-46.242) -106.237,-45.638 ; J1.1@-106.664,-45.462 ccw(c-106.237,-45.035) -106.237,-45.638 ; J1.1@-106.664,-45.462 ccw(c-106.237,-45.035) -106.237,-45.638 ; J1.1@-106.664,-45.462 ccw(c-106.237,-45.035) -106.237,-45.638 ; -106.174,-45.638 cw(c-106.174,-46.242) J1.2@-105.748,-45.815 ; -106.174,-45.638 ccw(c-106.174,-45.035) J1.2@-105.748,-45.462 ; -106.174,-45.638 cw(c-106.174,-46.242) J1.2@-105.748,-45.815 ; -106.174,-45.638 ccw(c-106.174,-45.035) J1.2@-105.748,-45.462 ; -106.174,-45.638 cw(c-106.174,-46.242) J1.2@-105.748,-45.815 ; -106.174,-45.638 ccw(c-106.174,-45.035) J1.2@-105.748,-45.462 ; U6.16@-72.821,-16.291 ccw(c-73.086,-16.026) -72.712,-16.026 ; U6.16@-72.821,-16.291 ccw(c-73.086,-16.026) -72.712,-16.026 ; U6.16@-72.821,-16.291 ccw(c-73.086,-16.026) -72.712,-16.026 ; U6.16@-72.821,-16.291 ccw(c-73.086,-16.026) -72.712,-16.026 ; U6.16@-72.821,-16.291 ccw(c-73.086,-16.026) -72.712,-16.026 ; -72.712,-16.026 ccw(c-72.338,-16.026) U6.16@-72.603,-16.291 ; -72.712,-16.026 ccw(c-72.338,-16.026) U6.16@-72.603,-16.291 ; -72.712,-16.026 ccw(c-72.338,-16.026) U6.16@-72.603,-16.291 ; -72.712,-16.026 ccw(c-72.338,-16.026) U6.16@-72.603,-16.291 ; -72.712,-16.026 ccw(c-72.338,-16.026) U6.16@-72.603,-16.291 ; C31.1@-27.053,-42.989 ccw(c-27.448,-42.594) -26.89,-42.594 ; C31.1@-27.053,-42.989 ccw(c-27.448,-42.594) -26.89,-42.594 ; C31.1@-27.053,-42.989 ccw(c-27.448,-42.594) -26.89,-42.594 ; C31.1@-27.053,-42.989 ccw(c-27.448,-42.594) -26.89,-42.594 ; C31.1@-27.053,-42.989 ccw(c-27.448,-42.594) -26.89,-42.594 ; U7.3@-26.907,-39.136 cw(c-27.931,-40.161) -26.483,-40.161 ; U7.3@-26.907,-39.136 cw(c-27.931,-40.161) -26.483,-40.161 ; U7.3@-26.907,-39.136 cw(c-27.931,-40.161) -26.483,-40.161 ; U7.3@-26.907,-39.136 cw(c-27.931,-40.161) -26.483,-40.161 ; U7.3@-26.907,-39.136 cw(c-27.931,-40.161) -26.483,-40.161 ; -26.89,-42.594 ccw(c-26.332,-42.594) C31.1@-26.727,-42.989 ; -26.89,-42.594 ccw(c-26.332,-42.594) C31.1@-26.727,-42.989 ; -26.89,-42.594 ccw(c-26.332,-42.594) C31.1@-26.727,-42.989 ; -26.89,-42.594 ccw(c-26.332,-42.594) C31.1@-26.727,-42.989 ; -26.89,-42.594 ccw(c-26.332,-42.594) C31.1@-26.727,-42.989 ; -26.483,-40.161 cw(c-25.034,-40.161) U7.3@-26.059,-39.136 ; -26.483,-40.161 cw(c-25.034,-40.161) U7.3@-26.059,-39.136 ; -26.483,-40.161 cw(c-25.034,-40.161) U7.3@-26.059,-39.136 ; -26.483,-40.161 cw(c-25.034,-40.161) U7.3@-26.059,-39.136 ; -26.483,-40.161 cw(c-25.034,-40.161) U7.3@-26.059,-39.136 ; J1.1@-106.614,-45.816 cw(c-106.185,-46.245) -106.185,-45.638 ccw(c-106.185,-46.245) J1.1@-106.614,-45.816 ; J1.1@-106.614,-45.463 ccw(c-106.19,-45.038) -106.19,-45.638 cw(c-106.19,-45.038) J1.1@-106.614,-45.463 ; -106.227,-45.638 cw(c-106.227,-46.245) -105.798,-45.816 ccw(c-106.227,-46.245) -106.227,-45.638 ; -106.222,-45.638 ccw(c-106.222,-45.038) -105.798,-45.463 cw(c-106.222,-45.038) -106.222,-45.638
  Top Layer w0.4: J2.83@-146.973,-97.744 -145.703,-97.744 v2(-127.9,-97.744) ; v2@-125.703,-81.02 v2(-125.703,-79.4) -125.703,-77.603 -124.9,-76.8 -121.7,-76.8 -117.4,-72.5 -109.9,-65 -109.9,-47.1 -108.438,-45.638 J1.1@-106.841,-45.638 ; J2.83@-146.781,-97.568 ccw(c-146.355,-97.142) -146.355,-97.744 cw(c-146.355,-97.142) J2.83@-146.781,-97.568 ; -146.32,-97.744 ccw(c-146.32,-97.142) -145.894,-97.568 cw(c-146.32,-97.142) -146.32,-97.744 ; J2.84@-145.511,-97.568 ccw(c-145.085,-97.142) -145.085,-97.744 cw(c-145.085,-97.142) J2.84@-145.511,-97.568 ; -107.376,-45.638 cw(c-107.376,-46.125) -107.032,-45.781 ccw(c-107.376,-46.125) -107.376,-45.638 ; -107.371,-45.638 ccw(c-107.371,-45.159) -107.032,-45.498 cw(c-107.371,-45.159) -107.371,-45.638
  Top Layer w0.5: v2(-106.841,-31) v2(-106.841,-29.7) -106.841,-27.541 -105.9,-26.6 -103.9,-24.6 v2(-103.9,-23.7) v2(-103.9,-21.9) v2(-103.9,-20.2) ; v2(-31.779,-29.1) v2(-31.779,-30.4) C29.1@-31.779,-32.32 C29.1@-31.76,-32.301 ; U7.3@-26.483,-38.712 -26.483,-32.301 C29.1@-31.76,-32.301 ; C29.1@-32.051,-31.921 ccw(c-32.709,-31.264) -31.779,-31.264 ; C29.1@-32.051,-31.921 ccw(c-32.709,-31.264) -31.779,-31.264 ; C29.1@-32.051,-31.921 ccw(c-32.709,-31.264) -31.779,-31.264 ; C29.1@-32.051,-31.921 ccw(c-32.709,-31.264) -31.779,-31.264 ; C29.1@-32.051,-31.921 ccw(c-32.709,-31.264) -31.779,-31.264 ; -31.779,-31.264 ccw(c-30.85,-31.264) C29.1@-31.507,-31.921 ; -31.779,-31.264 ccw(c-30.85,-31.264) C29.1@-31.507,-31.921 ; -31.779,-31.264 ccw(c-30.85,-31.264) C29.1@-31.507,-31.921 ; -31.779,-31.264 ccw(c-30.85,-31.264) C29.1@-31.507,-31.921 ; -31.779,-31.264 ccw(c-30.85,-31.264) C29.1@-31.507,-31.921 ; C29.1@-31.759,-32.301 cw(c-31.759,-35.98) U7.4@-28.748,-33.867 ; C29.1@-31.76,-32.301 ccw(c-31.76,-28.659) U7.4@-28.761,-30.726 ; C29.1@-31.759,-32.301 cw(c-31.759,-35.98) U7.4@-28.748,-33.867 ; C29.1@-31.76,-32.301 ccw(c-31.76,-28.659) U7.4@-28.761,-30.726 ; C29.1@-31.759,-32.301 cw(c-31.759,-35.98) U7.4@-28.748,-33.867 ; C29.1@-31.76,-32.301 ccw(c-31.76,-28.659) U7.4@-28.761,-30.726 ; C29.1@-31.759,-32.301 cw(c-31.759,-35.98) U7.4@-28.748,-33.867 ; C29.1@-31.76,-32.301 ccw(c-31.76,-28.659) U7.4@-28.761,-30.726 ; C29.1@-31.76,-32.301 ccw(c-31.76,-28.659) U7.4@-28.761,-30.726 ; C29.1@-31.759,-32.301 cw(c-31.759,-35.98) U7.4@-28.748,-33.867 ; C29.1@-31.507,-32.593 cw(c-30.803,-33.296) -30.803,-32.301 ; C29.1@-31.507,-32.593 cw(c-30.803,-33.296) -30.803,-32.301 ; C29.1@-31.507,-32.593 cw(c-30.803,-33.296) -30.803,-32.301 ; C29.1@-31.507,-32.593 cw(c-30.803,-33.296) -30.803,-32.301 ; C29.1@-31.507,-32.593 cw(c-30.803,-33.296) -30.803,-32.301 ; C29.1@-31.507,-32.048 ccw(c-30.896,-31.438) -30.896,-32.301 ; C29.1@-31.507,-32.048 ccw(c-30.896,-31.438) -30.896,-32.301 ; C29.1@-31.507,-32.048 ccw(c-30.896,-31.438) -30.896,-32.301 ; C29.1@-31.507,-32.048 ccw(c-30.896,-31.438) -30.896,-32.301 ; C29.1@-31.507,-32.048 ccw(c-30.896,-31.438) -30.896,-32.301 ; -30.808,-32.301 ccw(c-30.808,-29.315) U7.4@-28.349,-31.01 ; -30.808,-32.301 ccw(c-30.808,-29.315) U7.4@-28.349,-31.01 ; -30.808,-32.301 ccw(c-30.808,-29.315) U7.4@-28.349,-31.01 ; -30.808,-32.301 ccw(c-30.808,-29.315) U7.4@-28.349,-31.01 ; -30.808,-32.301 ccw(c-30.808,-29.315) U7.4@-28.349,-31.01 ; -30.798,-32.301 cw(c-30.798,-35.305) U7.4@-28.339,-33.58 ; -30.798,-32.301 cw(c-30.798,-35.305) U7.4@-28.339,-33.58 ; -30.798,-32.301 cw(c-30.798,-35.305) U7.4@-28.339,-33.58 ; -30.798,-32.301 cw(c-30.798,-35.305) U7.4@-28.339,-33.58 ; -30.798,-32.301 cw(c-30.798,-35.305) U7.4@-28.339,-33.58 ; -29.856,-32.301 ccw(c-29.856,-29.971) U7.4@-27.938,-31.294 ; -29.856,-32.301 ccw(c-29.856,-29.971) U7.4@-27.938,-31.294 ; -29.856,-32.301 ccw(c-29.856,-29.971) U7.4@-27.938,-31.294 ; -29.856,-32.301 ccw(c-29.856,-29.971) U7.4@-27.938,-31.294 ; -29.856,-32.301 ccw(c-29.856,-29.971) U7.4@-27.938,-31.294 ; -29.836,-32.301 cw(c-29.836,-34.63) U7.4@-27.929,-33.292 ; -29.836,-32.301 cw(c-29.836,-34.63) U7.4@-27.929,-33.292 ; -29.836,-32.301 cw(c-29.836,-34.63) U7.4@-27.929,-33.292 ; -29.836,-32.301 cw(c-29.836,-34.63) U7.4@-27.929,-33.292 ; -29.836,-32.301 cw(c-29.836,-34.63) U7.4@-27.929,-33.292 ; U7.4@-28.388,-34.284 cw(c-32.582,-38.712) U7.3@-26.483,-38.712 ; U7.4@-28.388,-34.284 cw(c-32.582,-38.712) U7.3@-26.483,-38.712 ; U7.4@-28.388,-34.284 cw(c-32.582,-38.712) U7.3@-26.483,-38.712 ; U7.4@-28.388,-34.284 cw(c-32.582,-38.712) U7.3@-26.483,-38.712 ; U7.4@-28.388,-34.284 cw(c-32.582,-38.712) U7.3@-26.483,-38.712 ; U7.4@-28.044,-33.921 cw(c-31.481,-37.549) -26.483,-37.549 ; U7.4@-28.044,-33.921 cw(c-31.481,-37.549) -26.483,-37.549 ; U7.4@-28.044,-33.921 cw(c-31.481,-37.549) -26.483,-37.549 ; U7.4@-28.044,-33.921 cw(c-31.481,-37.549) -26.483,-37.549 ; U7.4@-28.044,-33.921 cw(c-31.481,-37.549) -26.483,-37.549 ; U7.4@-27.7,-33.558 cw(c-30.38,-36.387) -26.483,-36.387 ; U7.4@-27.7,-33.558 cw(c-30.38,-36.387) -26.483,-36.387 ; U7.4@-27.7,-33.558 cw(c-30.38,-36.387) -26.483,-36.387 ; U7.4@-27.7,-33.558 cw(c-30.38,-36.387) -26.483,-36.387 ; U7.4@-27.7,-33.558 cw(c-30.38,-36.387) -26.483,-36.387 ; U7.3@-26.836,-38.358 ccw(c-27.69,-37.505) -26.483,-37.505 ; U7.3@-26.836,-38.358 ccw(c-27.69,-37.505) -26.483,-37.505 ; U7.3@-26.836,-38.358 ccw(c-27.69,-37.505) -26.483,-37.505 ; U7.3@-26.836,-38.358 ccw(c-27.69,-37.505) -26.483,-37.505 ; U7.3@-26.836,-38.358 ccw(c-27.69,-37.505) -26.483,-37.505 ; U7.3@-26.483,-38.712 cw(c-20.322,-38.712) U7.4@-24.591,-34.27 ; U7.3@-26.483,-38.712 cw(c-20.322,-38.712) U7.4@-24.591,-34.27 ; U7.3@-26.483,-38.712 cw(c-20.322,-38.712) U7.4@-24.591,-34.27 ; U7.3@-26.483,-38.712 cw(c-20.322,-38.712) U7.4@-24.591,-34.27 ; U7.3@-26.483,-38.712 cw(c-20.322,-38.712) U7.4@-24.591,-34.27 ; -26.483,-37.538 cw(c-21.45,-37.538) U7.4@-24.938,-33.909 ; -26.483,-37.538 cw(c-21.45,-37.538) U7.4@-24.938,-33.909 ; -26.483,-37.538 cw(c-21.45,-37.538) U7.4@-24.938,-33.909 ; -26.483,-37.538 cw(c-21.45,-37.538) U7.4@-24.938,-33.909 ; -26.483,-37.538 cw(c-21.45,-37.538) U7.4@-24.938,-33.909 ; -26.483,-37.505 ccw(c-25.276,-37.505) U7.3@-26.129,-38.358 ; -26.483,-37.505 ccw(c-25.276,-37.505) U7.3@-26.129,-38.358 ; -26.483,-37.505 ccw(c-25.276,-37.505) U7.3@-26.129,-38.358 ; -26.483,-37.505 ccw(c-25.276,-37.505) U7.3@-26.129,-38.358 ; -26.483,-37.505 ccw(c-25.276,-37.505) U7.3@-26.129,-38.358 ; -26.483,-36.364 cw(c-22.579,-36.364) U7.4@-25.284,-33.549 ; -26.483,-36.364 cw(c-22.579,-36.364) U7.4@-25.284,-33.549 ; -26.483,-36.364 cw(c-22.579,-36.364) U7.4@-25.284,-33.549 ; -26.483,-36.364 cw(c-22.579,-36.364) U7.4@-25.284,-33.549 ; -26.483,-36.364 cw(c-22.579,-36.364) U7.4@-25.284,-33.549
  Bottom Layer w0.15: v2(-125.703,-92.003) v2@-125.703,-91.997 ; v1@-117.312,-75.088 cw(c-117.098,-75.302) -117.098,-75 cw(c-117.098,-74.698) v1@-117.312,-74.912 ; v1@-117.276,-75.124 cw(c-116.978,-75.422) -116.978,-75 cw(c-116.978,-74.578) v1@-117.276,-74.876 ; v1@-113.067,-75.124 ccw(c-113.366,-75.422) -113.366,-75 ccw(c-113.366,-74.578) v1@-113.067,-74.876 ; v1@-113.032,-75.088 ccw(c-113.245,-75.302) -113.245,-75 ccw(c-113.245,-74.698) v1@-113.032,-74.912 ; v1(-95.065,-79.365) -91.7,-76 -79.8,-76 -77.4,-73.6 v1(-77.4,-70.9) ; v1@-95.065,-79.19 ccw(c-95.065,-78.768) -94.766,-79.066 ccw(c-94.468,-79.365) v1@-94.89,-79.365 ; W1.2@-88.095,-98.527 -85.973,-98.527 -85.3,-99.2 -68.9,-99.2 -67.025,-101.075 v1(-67.025,-103.525) ; W1.2@-87.83,-98.792 cw(c-87.19,-99.432) -87.19,-98.527 cw(c-87.19,-97.621) W1.2@-87.83,-98.261 ; W1.2@-87.724,-98.898 cw(c-86.828,-99.794) -86.828,-98.527 cw(c-86.828,-97.259) W1.2@-87.724,-98.155 ; W1.2@-87.618,-99.004 cw(c-86.465,-100.156) -86.465,-98.527 cw(c-86.465,-96.897) W1.2@-87.618,-98.049 ; v1@-77.524,-71.024 cw(c-77.822,-71.322) -77.4,-71.322 cw(c-76.978,-71.322) v1@-77.276,-71.024 ; v1@-67.149,-103.401 ccw(c-67.447,-103.103) -67.025,-103.103 ccw(c-66.603,-103.103) v1@-66.901,-103.401 ; -31.779,-15.921 -21.079,-15.921 -20.481,-16.519 v1(-20.481,-18.719) ; v1@-20.605,-18.595 ccw(c-20.903,-18.297) -20.481,-18.297 ccw(c-20.058,-18.297) v1@-20.357,-18.595
  Bottom Layer w0.2: CON3.2@-162.067,-103.106 -161.061,-102.1 -150.2,-102.1 -149.14,-101.04 -149.14,-98.06 v1(-149.14,-77.74) ; v1@-151.464,-13.718 cw(c-151.635,-13.888) -151.394,-13.888 cw(c-151.152,-13.888) v1@-151.323,-13.718 ; CON1.17@-151.394,-23.203 v1(-151.394,-13.647) ; v1@-149.211,-77.811 cw(c-149.382,-77.982) -149.14,-77.982 cw(c-148.899,-77.982) v1@-149.07,-77.811 ; JTAG1.2@-139.099,-18.403 -130.797,-18.403 -121.7,-27.5 v2(-121.7,-35.801) ; CON3.2@-162.067,-102.806 ccw(c-162.067,-102.082) -161.555,-102.594 ; CON3.2@-162.067,-102.806 ccw(c-162.067,-102.082) -161.555,-102.594 ; CON3.2@-162.067,-102.806 ccw(c-162.067,-102.082) -161.555,-102.594 ; CON3.2@-162.067,-102.806 ccw(c-162.067,-102.082) -161.555,-102.594 ; CON3.2@-162.067,-102.806 ccw(c-162.067,-102.082) -161.555,-102.594 ; CON3.2@-162.067,-102.606 ccw(c-162.067,-101.399) -161.214,-102.253 ; CON3.2@-162.067,-102.606 ccw(c-162.067,-101.399) -161.214,-102.253 ; CON3.2@-162.067,-102.606 ccw(c-162.067,-101.399) -161.214,-102.253 ; CON3.2@-162.067,-102.606 ccw(c-162.067,-101.399) -161.214,-102.253 ; CON3.2@-162.067,-102.606 ccw(c-162.067,-101.399) -161.214,-102.253 ; CON3.2@-161.767,-103.106 cw(c-161.043,-103.106) -161.555,-102.594 ; CON3.2@-161.767,-103.106 cw(c-161.043,-103.106) -161.555,-102.594 ; CON3.2@-161.767,-103.106 cw(c-161.043,-103.106) -161.555,-102.594 ; CON3.2@-161.767,-103.106 cw(c-161.043,-103.106) -161.555,-102.594 ; CON3.2@-161.767,-103.106 cw(c-161.043,-103.106) -161.555,-102.594 ; CON3.2@-161.567,-103.106 cw(c-160.36,-103.106) -161.214,-102.253 ; CON3.2@-161.567,-103.106 cw(c-160.36,-103.106) -161.214,-102.253 ; CON3.2@-161.567,-103.106 cw(c-160.36,-103.106) -161.214,-102.253 ; CON3.2@-161.567,-103.106 cw(c-160.36,-103.106) -161.214,-102.253 ; CON3.2@-161.567,-103.106 cw(c-160.36,-103.106) -161.214,-102.253 ; CON1.17@-151.747,-22.849 ccw(c-152.601,-21.995) -151.394,-21.995 ; CON1.17@-151.747,-22.849 ccw(c-152.601,-21.995) -151.394,-21.995 ; CON1.17@-151.747,-22.849 ccw(c-152.601,-21.995) -151.394,-21.995 ; CON1.17@-151.747,-22.849 ccw(c-152.601,-21.995) -151.394,-21.995 ; CON1.17@-151.747,-22.849 ccw(c-152.601,-21.995) -151.394,-21.995 ; CON1.17@-151.606,-22.99 ccw(c-152.118,-22.478) -151.394,-22.478 ; CON1.17@-151.606,-22.99 ccw(c-152.118,-22.478) -151.394,-22.478 ; CON1.17@-151.606,-22.99 ccw(c-152.118,-22.478) -151.394,-22.478 ; CON1.17@-151.606,-22.99 ccw(c-152.118,-22.478) -151.394,-22.478 ; CON1.17@-151.606,-22.99 ccw(c-152.118,-22.478) -151.394,-22.478 ; v1@-151.5,-13.753 cw(c-151.756,-14.009) -151.394,-14.009 ; v1@-151.5,-13.753 cw(c-151.756,-14.009) -151.394,-14.009 ; v1@-151.5,-13.753 cw(c-151.756,-14.009) -151.394,-14.009 ; v1@-151.5,-13.753 cw(c-151.756,-14.009) -151.394,-14.009 ; -151.394,-22.478 ccw(c-150.669,-22.478) CON1.17@-151.181,-22.99 ; -151.394,-22.478 ccw(c-150.669,-22.478) CON1.17@-151.181,-22.99 ; -151.394,-22.478 ccw(c-150.669,-22.478) CON1.17@-151.181,-22.99 ; -151.394,-22.478 ccw(c-150.669,-22.478) CON1.17@-151.181,-22.99 ; -151.394,-22.478 ccw(c-150.669,-22.478) CON1.17@-151.181,-22.99 ; -151.394,-21.995 ccw(c-150.186,-21.995) CON1.17@-151.04,-22.849 ; -151.394,-21.995 ccw(c-150.186,-21.995) CON1.17@-151.04,-22.849 ; -151.394,-21.995 ccw(c-150.186,-21.995) CON1.17@-151.04,-22.849 ; -151.394,-21.995 ccw(c-150.186,-21.995) CON1.17@-151.04,-22.849 ; -151.394,-21.995 ccw(c-150.186,-21.995) CON1.17@-151.04,-22.849 ; -151.394,-14.009 cw(c-151.031,-14.009) v1@-151.288,-13.753 ; -151.394,-14.009 cw(c-151.031,-14.009) v1@-151.288,-13.753 ; -151.394,-14.009 cw(c-151.031,-14.009) v1@-151.288,-13.753 ; -151.394,-14.009 cw(c-151.031,-14.009) v1@-151.288,-13.753 ; v1@-149.246,-77.846 cw(c-149.503,-78.103) -149.14,-78.103 ; v1@-149.246,-77.846 cw(c-149.503,-78.103) -149.14,-78.103 ; v1@-149.246,-77.846 cw(c-149.503,-78.103) -149.14,-78.103 ; v1@-149.246,-77.846 cw(c-149.503,-78.103) -149.14,-78.103 ; -149.14,-78.103 cw(c-148.778,-78.103) v1@-149.034,-77.846 ; -149.14,-78.103 cw(c-148.778,-78.103) v1@-149.034,-77.846 ; -149.14,-78.103 cw(c-148.778,-78.103) v1@-149.034,-77.846 ; -149.14,-78.103 cw(c-148.778,-78.103) v1@-149.034,-77.846 ; JTAG1.2@-138.887,-18.615 cw(c-138.375,-19.127) -138.375,-18.403 ; JTAG1.2@-138.887,-18.615 cw(c-138.375,-19.127) -138.375,-18.403 ; JTAG1.2@-138.887,-18.615 cw(c-138.375,-19.127) -138.375,-18.403 ; JTAG1.2@-138.887,-18.615 cw(c-138.375,-19.127) -138.375,-18.403 ; JTAG1.2@-138.887,-18.615 cw(c-138.375,-19.127) -138.375,-18.403 ; JTAG1.2@-138.887,-18.19 ccw(c-138.375,-17.678) -138.375,-18.403 ; JTAG1.2@-138.887,-18.19 ccw(c-138.375,-17.678) -138.375,-18.403 ; JTAG1.2@-138.887,-18.19 ccw(c-138.375,-17.678) -138.375,-18.403 ; JTAG1.2@-138.887,-18.19 ccw(c-138.375,-17.678) -138.375,-18.403 ; JTAG1.2@-138.887,-18.19 ccw(c-138.375,-17.678) -138.375,-18.403 ; JTAG1.2@-138.745,-18.756 cw(c-137.892,-19.61) -137.892,-18.403 ; JTAG1.2@-138.745,-18.756 cw(c-137.892,-19.61) -137.892,-18.403 ; JTAG1.2@-138.745,-18.756 cw(c-137.892,-19.61) -137.892,-18.403 ; JTAG1.2@-138.745,-18.756 cw(c-137.892,-19.61) -137.892,-18.403 ; JTAG1.2@-138.745,-18.756 cw(c-137.892,-19.61) -137.892,-18.403 ; JTAG1.2@-138.745,-18.049 ccw(c-137.892,-17.195) -137.892,-18.403 ; JTAG1.2@-138.745,-18.049 ccw(c-137.892,-17.195) -137.892,-18.403 ; JTAG1.2@-138.745,-18.049 ccw(c-137.892,-17.195) -137.892,-18.403 ; JTAG1.2@-138.745,-18.049 ccw(c-137.892,-17.195) -137.892,-18.403 ; JTAG1.2@-138.745,-18.049 ccw(c-137.892,-17.195) -137.892,-18.403 ; v2@-121.841,-35.659 ccw(c-122.183,-35.318) -121.7,-35.318 ; v2@-121.841,-35.659 ccw(c-122.183,-35.318) -121.7,-35.318 ; v2@-121.841,-35.659 ccw(c-122.183,-35.318) -121.7,-35.318 ; v2@-121.841,-35.659 ccw(c-122.183,-35.318) -121.7,-35.318 ; v2@-121.841,-35.659 ccw(c-122.183,-35.318) -121.7,-35.318 ; -121.7,-35.318 ccw(c-121.217,-35.318) v2@-121.559,-35.659 ; -121.7,-35.318 ccw(c-121.217,-35.318) v2@-121.559,-35.659 ; -121.7,-35.318 ccw(c-121.217,-35.318) v2@-121.559,-35.659 ; -121.7,-35.318 ccw(c-121.217,-35.318) v2@-121.559,-35.659 ; -121.7,-35.318 ccw(c-121.217,-35.318) v2@-121.559,-35.659
  Bottom Layer w0.25: v1(-117.4,-75) v1(-112.944,-75) ; v1(-110.4,-96.2) -110.4,-97.2 -108.6,-99 v1(-104.3,-99) ; v1(-94.8,-94.5) v1(-88.1,-94.5) ; v1@-117.312,-75.088 cw(c-117.098,-75.302) -117.098,-75 ; v1@-117.312,-75.088 cw(c-117.098,-75.302) -117.098,-75 ; v1@-117.312,-75.088 cw(c-117.098,-75.302) -117.098,-75 ; v1@-117.312,-74.912 ccw(c-117.098,-74.698) -117.098,-75 ; v1@-117.312,-74.912 ccw(c-117.098,-74.698) -117.098,-75 ; v1@-117.312,-74.912 ccw(c-117.098,-74.698) -117.098,-75 ; -113.245,-75 cw(c-113.245,-75.302) v1@-113.032,-75.088 ; -113.245,-75 ccw(c-113.245,-74.698) v1@-113.032,-74.912 ; -113.245,-75 cw(c-113.245,-75.302) v1@-113.032,-75.088 ; -113.245,-75 ccw(c-113.245,-74.698) v1@-113.032,-74.912 ; -113.245,-75 ccw(c-113.245,-74.698) v1@-113.032,-74.912 ; -113.245,-75 cw(c-113.245,-75.302) v1@-113.032,-75.088 ; v1@-110.488,-96.288 cw(c-110.702,-96.502) -110.4,-96.502 ; v1@-110.488,-96.288 cw(c-110.702,-96.502) -110.4,-96.502 ; v1@-110.488,-96.288 cw(c-110.702,-96.502) -110.4,-96.502 ; -110.4,-96.502 cw(c-110.098,-96.502) v1@-110.312,-96.288 ; -110.4,-96.502 cw(c-110.098,-96.502) v1@-110.312,-96.288 ; -110.4,-96.502 cw(c-110.098,-96.502) v1@-110.312,-96.288 ; -104.602,-99 cw(c-104.602,-99.302) v1@-104.388,-99.088 ; -104.602,-99 ccw(c-104.602,-98.698) v1@-104.388,-98.912 ; -104.602,-99 cw(c-104.602,-99.302) v1@-104.388,-99.088 ; -104.602,-99 ccw(c-104.602,-98.698) v1@-104.388,-98.912 ; -104.602,-99 ccw(c-104.602,-98.698) v1@-104.388,-98.912 ; -104.602,-99 cw(c-104.602,-99.302) v1@-104.388,-99.088 ; v1@-94.712,-94.588 cw(c-94.498,-94.802) -94.498,-94.5 ; v1@-94.712,-94.588 cw(c-94.498,-94.802) -94.498,-94.5 ; v1@-94.712,-94.588 cw(c-94.498,-94.802) -94.498,-94.5 ; v1@-94.712,-94.412 ccw(c-94.498,-94.198) -94.498,-94.5 ; v1@-94.712,-94.412 ccw(c-94.498,-94.198) -94.498,-94.5 ; v1@-94.712,-94.412 ccw(c-94.498,-94.198) -94.498,-94.5 ; -88.402,-94.5 cw(c-88.402,-94.802) v1@-88.188,-94.588 ; -88.402,-94.5 ccw(c-88.402,-94.198) v1@-88.188,-94.412 ; -88.402,-94.5 cw(c-88.402,-94.802) v1@-88.188,-94.588 ; -88.402,-94.5 ccw(c-88.402,-94.198) v1@-88.188,-94.412 ; -88.402,-94.5 ccw(c-88.402,-94.198) v1@-88.188,-94.412 ; -88.402,-94.5 cw(c-88.402,-94.802) v1@-88.188,-94.588